# Altium PCB RoboBallPCB.PcbDoc
Units mm, origin at the board's own origin, x right, y up, seen from the top; angles counter-clockwise.
Board outline 152.4 x 101.6 mm, 2 copper layers (Top Layer, Bottom Layer); 30 components, 10 nets, 64 pads, 0 vias.
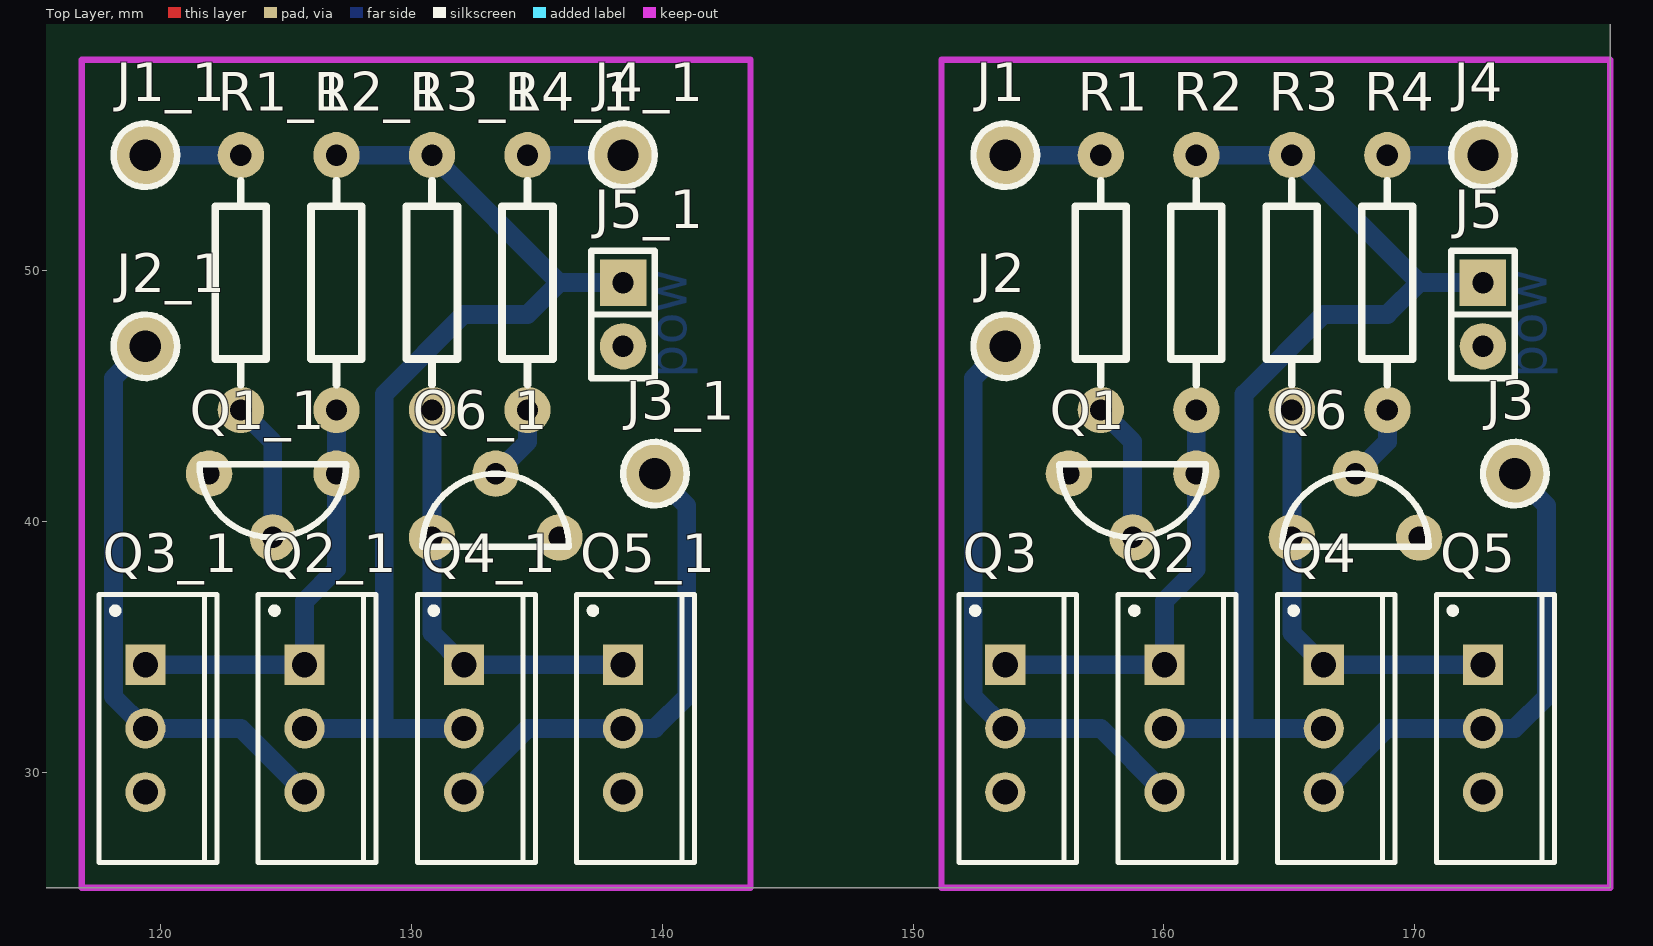
[diagram p0: Top Layer view]
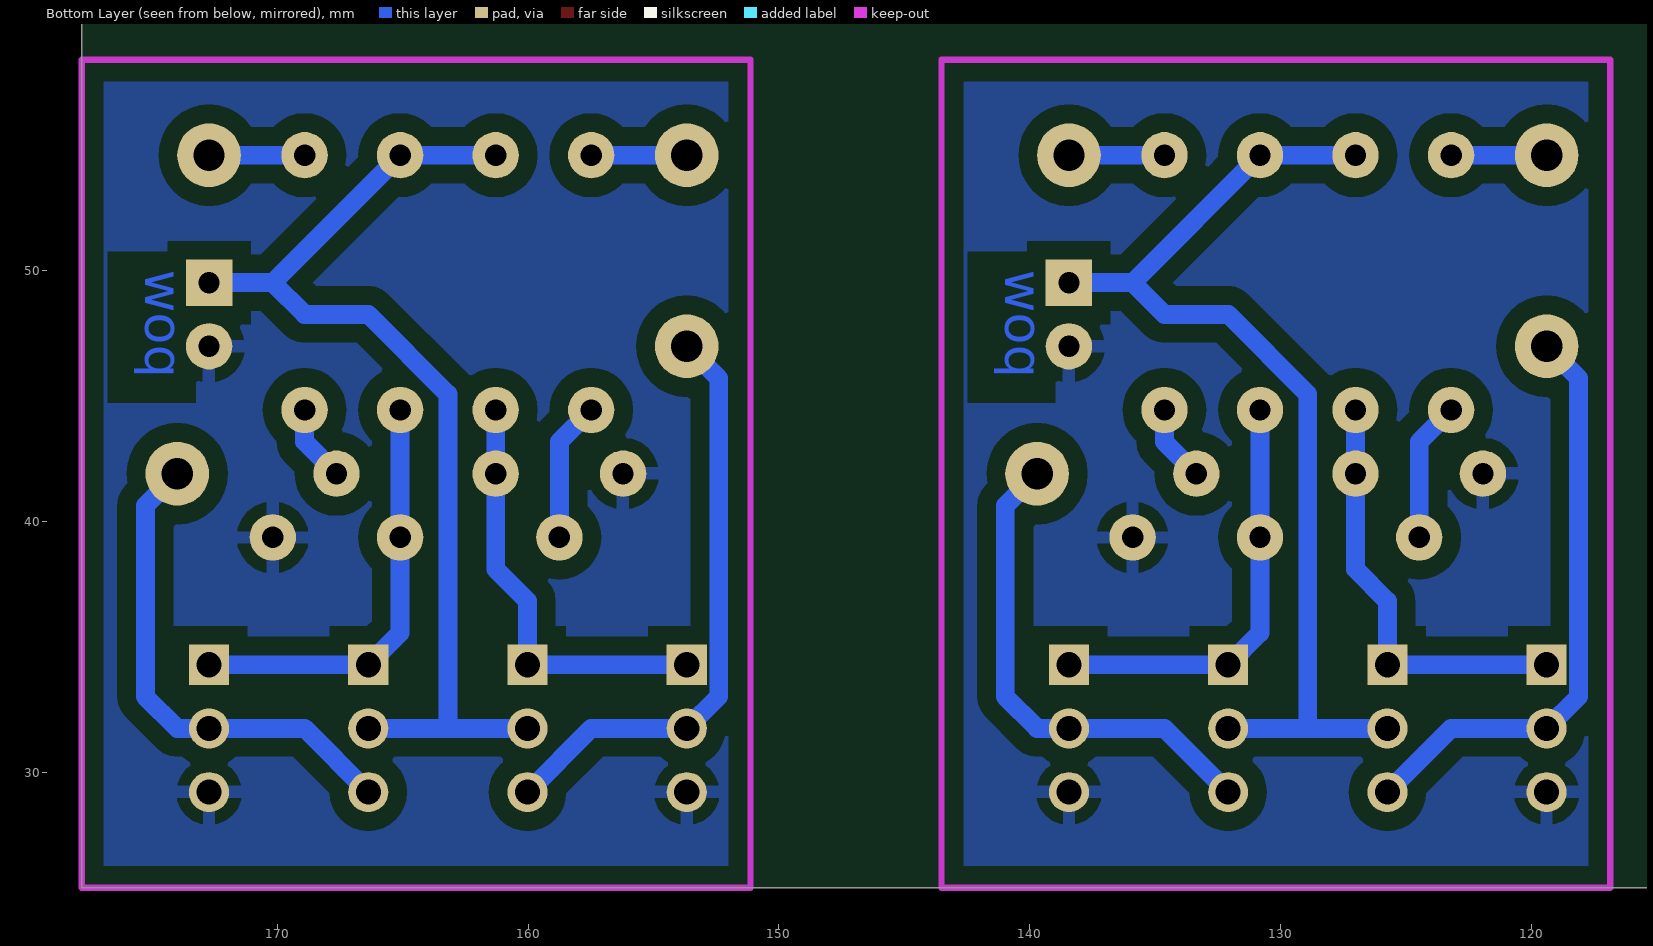
[diagram p1: Bottom Layer view, seen from below]

## Layer stack, top to bottom
Top Solder: solder mask 0.0102, Solder Resist, Dk 3.5
Top Layer: signal copper 0.0356
Dielectric 1: dielectric 0.32, FR-4, Dk 4.8
Bottom Layer: signal copper 0.0356
Bottom Solder: solder mask 0.0102, Solder Resist, Dk 3.5

## Board outline
25.4,25.4 177.8,25.4 177.8,127 25.4,127

## Design rules (kind name [scope] priority, off if disabled: settings)
Clearance [All] p1: gap=0.75 ignorepadtopadclearanceinfootprint=TRUE except(0.1: Arc-Arc Arc-Track Arc-SMDPad Arc-THPad Arc-Via Arc-Text Arc-Hole Track-Track Track-SMDPad Track-THPad Track-Via Track-Text Track-Hole SMDPad-SMDPad SMDPad-THPad SMDPad-Via SMDPad-Text SMDPad-Hole THPad-THPad THPad-Via THPad-Text THPad-Hole Via-Via Via-Text Via-Hole Text-Text Text-Hole)
HoleSize [All] p1: absolutevalues=TRUE maxlimit=4.1 minlimit=0.75 maxpercent=80.000 minpercent=20.000
MinimumAnnularRing [All] p1: minimumring=0.5
PolygonConnect [All] p1: connectstyle=Relief reliefconductorwidth=0.5 reliefentries=4 polygonreliefangle="90 Angle" airgapwidth=0.5
RoutingVias [All] p1: holewidth=0.85 width=1.85 viastyle="Through Hole" minholewidth=0.75 minwidth=1.75 maxholewidth=0.95 maxwidth=1.95
SolderMaskExpansion [All] p1: expansion=0.102
Width [All] p1: maxlimit=6 minlimit=0.4 preferedwidth=0.75
29 further rules are at their usual default settings.

## Classes and differential pairs
component class RoboBallPCB: J1 J2 J3 J4 J5 Q1 Q2 Q3 Q4 Q5 Q6 R1 R2 R3 R4

## Components (designator, comment, footprint, x,y, rotation, side; value= is the part's Value field where it differs from the comment)
J1 "CON1" Pin1 153.67,54.61 r0 top
J1_1 "CON1" Pin1 119.38,54.61 r0 top (schematic designator J1)
J2 "CON1" Pin1 153.67,46.99 r0 top
J2_1 "CON1" Pin1 119.38,46.99 r0 top (schematic designator J2)
J3 "CON1" Pin1 173.99,41.91 r0 top
J3_1 "CON1" Pin1 139.7,41.91 r0 top (schematic designator J3)
J4 "CON1" Pin1 172.72,54.61 r0 top
J4_1 "CON1" Pin1 138.43,54.61 r0 top (schematic designator J4)
J5 "CON2" SIP-2 172.72,48.26 r270 top
J5_1 "CON2" SIP-2 138.43,48.26 r270 top (schematic designator J5)
Q1 "BC547B" TO-92/EBC 158.75,41.91 r180 top
Q1_1 "BC547B" TO-92/EBC 124.46,41.91 r180 top (schematic designator Q1)
Q2 "PMOS-2" TO-220AB 160.02,31.75 r270 top
Q2_1 "PMOS-2" TO-220AB 125.73,31.75 r270 top (schematic designator Q2)
Q3 "NMOS-2" TO-220AB 153.67,31.75 r270 top
Q3_1 "NMOS-2" TO-220AB 119.38,31.75 r270 top (schematic designator Q3)
Q4 "PMOS-2" TO-220AB 166.37,31.75 r270 top
Q4_1 "PMOS-2" TO-220AB 132.08,31.75 r270 top (schematic designator Q4)
Q5 "NMOS-2" TO-220AB 172.72,31.75 r270 top
Q5_1 "NMOS-2" TO-220AB 138.43,31.75 r270 top (schematic designator Q5)
Q6 "BC547B" TO-92/EBC 167.64,39.37 r0 top
Q6_1 "BC547B" TO-92/EBC 133.35,39.37 r0 top (schematic designator Q6)
R1 "RES" Axial-0.4 157.48,49.53 r270 top value=220
R1_1 "RES" Axial-0.4 123.19,49.53 r270 top value=220 (schematic designator R1)
R2 "RES" Axial-0.4 161.29,49.53 r90 top value=1k2
R2_1 "RES" Axial-0.4 127,49.53 r90 top value=1k2 (schematic designator R2)
R3 "RES" Axial-0.4 165.1,49.53 r90 top value=1k2
R3_1 "RES" Axial-0.4 130.81,49.53 r90 top value=1k2 (schematic designator R3)
R4 "RES" Axial-0.4 168.91,49.53 r90 top value=220
R4_1 "RES" Axial-0.4 134.62,49.53 r90 top value=220 (schematic designator R4)

## Footprints (in the part's own frame and the unit in brackets; to place one, negate y for a bottom-side part, rotate by r counter-clockwise, add the part's x,y. Pads: shape width x height; smd on the part's side, far side on the other; paste and mask are expansions set on the pad)
Axial-0.4 [mm]
  round 1.85 hole 0.85: 1(-5.08,0) 2(5.08,0)
  silkscreen extent -4.06,-1.02 4.06,1.02
Pin1 [mm]
  round 2.54 hole 1.25: 1(0,0)
  silkscreen extent -1.27,-1.27 1.27,1.27
SIP-2 [mm]
  rect 1.85x1.85 hole 0.85: 1(-1.27,0)
  round 1.85 hole 0.85: 2(1.27,0)
  silkscreen extent -2.54,-1.27 2.54,1.27
TO-92/EBC [mm] "Standard-Transistor wie BC546"
  round 1.85 hole 0.85: 1(0,2.54) 2(2.54,0) 3(-2.54,0)
  silkscreen extent -2.93,-0.38 2.92,2.54
TO-220AB [mm] "TO, Thru-Hole, Vertical, Heatsink Mounted; 3 In-Line Leads; Pitch 2.54 mm"
  rect 1.6x1.6 hole 1: 1(-2.54,0)
  round 1.6 hole 1: 2(0,0) 3(2.54,0)
  silkscreen extent -5.35,-1.85 5.35,2.85, body extent -5.4,-1.9 5.4,2.9, height 19.3

## Part data
J1 J1_1 J2 J2_1 J3 J3_1 J4 J4_1 J5 J5_1: "Stecker"
Q1 Q1_1 Q6 Q6_1: library part BC546B, "Amplifier Transistor NPN Silicon", ComponentLink1Description="Manufacturer Link", ComponentLink1URL=http://www.onsemi.com/site/products/landing?taxonomyID=194, ComponentLink2Description=Datasheet, ComponentLink2URL=http://www.onsemi.com/pub/Collateral/BC546-D.PDF, DatasheetVersion=1991, LatestRevisionDate=17-Jul-2002, LatestRevisionNote="Re-released for DXP Platform.", PackageDescription="TO, Flat Index; 3 In-Line, Axial Leads; Body Dia. 4.8mm; Leads 0.48 x 0.5 mm (max)", PackageReference=29-04, PackageVersion=1996, Published=29-Sep-2000, Publisher="Altium Limited"
Q2 Q2_1 Q4 Q4_1: "P-Channel Power MOSFET", ComponentLink1Description="Manufacturer Link", ComponentLink1URL=http://www.irf.com/, DatasheetVersion=PD-9.390D, LatestRevisionDate=17-Jul-2002, LatestRevisionNote="Re-released for DXP Platform.", Note="Pin 4 not drawn and electrically connected to Pin 2.", PackageDescription="TO, Thru-Hole, Vertical, Heatsink Mounted; 3 In-Line Leads; Pitch 2.54 mm", PackageReference=TO-220AB, PackageVersion=Feb-1997, Published=8-Jun-2000, Publisher="Altium Limited"
Q3 Q3_1 Q5 Q5_1: "N-Channel Power MOSFET", ComponentLink1Description="Manufacturer Link", ComponentLink1URL=http://www.irf.com/, DatasheetVersion=PD-9.814, LatestRevisionDate=17-Jul-2002, LatestRevisionNote="Re-released for DXP Platform.", Note="Pin 2 is electrically connected to pin 4.", PackageDescription="TO, Thru-Hole, Vertical, Heatsink Mounted; 3 In-Line Leads; Pitch 2.54 mm", PackageReference=TO-220AB, PackageVersion=Feb-1997, Published=8-Jun-2000, Publisher="Altium Limited"
R1 R1_1 R2 R2_1 R3 R3_1 R4 R4_1: "Widerstand"

## Nets (pads, with @x,y where several pads share a name; then routed paths per layer and width w, separated by ;. In a path a pad name is that pad's centre, name@x,y a point inside that pad or via, vN(x,y) a via of type N, cw(c..) or ccw(c..) an arc to the next point about the centre after c; other vN are vias at no path point)
GND: J5.2 Q1.2 Q3.3 Q5.3 Q6.2
NetJ1_1: J1.1 R1.1 | length 3.8
  Bottom Layer w0.75: J1.1 R1.1
NetJ2_1: J2.1 Q2.3 Q3.2 | length 23.7
  Bottom Layer w0.75: J2.1 152.395,45.715 152.395,33.025 Q3.2 157.48,31.75 Q2.3
NetJ3_1: J3.1 Q4.3 Q5.2 | length 19.9
  Bottom Layer w0.75: Q4.3 168.91,31.75 Q5.2 173.99,31.75 175.26,33.02 175.26,40.64 J3.1
NetJ4_1: J4.1 R4.2 | length 3.8
  Bottom Layer w0.75: R4.2 J4.1
NetQ1_1: Q1.3 Q2.1 Q3.1 R2.1 | length 17
  Bottom Layer w0.75: Q3.1 Q2.1 160.02,36.83 161.29,38.1 Q1.3 R2.1
NetQ1_2: Q1.1 R1.2 | length 5.6
  Bottom Layer w0.75: R1.2 158.75,43.18 Q1.1
NetQ4_1: Q4.1 Q5.1 Q6.3 R3.1 | length 17
  Bottom Layer w0.75: R3.1 Q6.3 165.1,35.56 Q4.1 Q5.1
NetQ6_2: Q6.1 R4.1 | length 3.1
  Bottom Layer w0.75: Q6.1 168.91,43.18 R4.1
VCC: J5.1 Q2.2 Q4.2 R2.2 R3.2 | length 42
  Bottom Layer w0.75: Q2.2 163.195,31.75 ; R2.2 R3.2 170.18,49.53 ; Q4.2 163.195,31.75 ; J5.1 170.18,49.53 ; 163.195,31.75 163.195,45.085 166.37,48.26 168.91,48.26 170.18,49.53
pads on no net: J1_1.1 J2_1.1 J3_1.1 J4_1.1 J5_1.1 J5_1.2 Q1_1.1 Q1_1.2 Q1_1.3 Q2_1.1 Q2_1.2 Q2_1.3 Q3_1.1 Q3_1.2 Q3_1.3 Q4_1.1 Q4_1.2 Q4_1.3 Q5_1.1 Q5_1.2 Q5_1.3 Q6_1.1 Q6_1.2 Q6_1.3 R1_1.1 R1_1.2 R2_1.1 R2_1.2 R3_1.1 R3_1.2 R4_1.1 R4_1.2
copper on no net: | length 136
  Bottom Layer w0.75: 119.38,34.29 125.73,34.29 125.73,36.83 127,38.1 127,41.91 127,44.45 ; 119.38,46.99 118.105,45.715 118.105,33.025 119.38,31.75 123.19,31.75 125.73,29.21 ; 119.38,54.61 123.19,54.61 ; 123.19,44.45 124.46,43.18 124.46,39.37 ; 125.73,31.75 128.905,31.75 ; 127,54.61 130.81,54.61 135.89,49.53 ; 130.81,44.45 130.81,39.37 130.81,35.56 132.08,34.29 138.43,34.29 ; 132.08,29.21 134.62,31.75 138.43,31.75 139.7,31.75 140.97,33.02 140.97,40.64 139.7,41.91 ; 132.08,31.75 128.905,31.75 ; 133.35,41.91 134.62,43.18 134.62,44.45 ; 134.62,54.61 138.43,54.61 ; 138.43,49.53 135.89,49.53 ; 128.905,31.75 128.905,45.085 132.08,48.26 134.62,48.26 135.89,49.53

## Polygon pours and split planes (outlines as drawn)
no net on Bottom Layer "NONET_L02_P018" (solid, remove dead copper, pour order 18): 143.51,58.42 143.51,25.4 116.84,25.4 116.84,58.42
GND on Bottom Layer "GND_L02_P010" (solid, remove dead copper, pour order 10): 177.8,58.42 177.8,25.4 151.13,25.4 151.13,58.42

## Keep-outs
Keep-Out Layer:
  lines w0.254: 116.84,25.4 143.51,25.4 143.51,58.42 116.84,58.42 116.84,25.4 ; 151.13,25.4 151.13,58.42 177.8,58.42 177.8,25.4 151.13,25.4

## Other copper
Bottom Layer:
  text "pow" at 140.97,45.72 h1.52 r90
  text "pow" at 175.26,45.72 h1.52 r90

## Silkscreen, mask and mechanical layers (free items; w line width, h text height)
Kontur:
  lines w0.254: 116.84,25.4 116.84,58.42 143.51,58.42 143.51,25.4 116.84,25.4 ; 151.13,25.4 177.8,25.4 177.8,58.42 151.13,58.42 151.13,25.4
Drill Drawing:
  circle w0.254: c63.579,87.207 r0.847
  lines w0.254: 62.733,80.433 64.426,80.433 63.579,78.74 62.733,80.433 ; 62.733,82.973 63.156,82.973 63.579,82.55 64.003,82.973 64.426,82.973 64.003,83.397 64.426,83.82 64.003,83.82 63.579,84.243 63.156,83.82 62.733,83.82 63.156,83.397 62.733,82.973
  lines w0.381: 61.214,77.597 327.942,77.597 ; 61.214,89.027 327.942,89.027 ; 75.206,73.787 75.206,92.837 ; 88.919,73.787 88.919,92.837 ; 117.358,73.787 117.358,92.837 ; 130.208,73.787 130.208,92.837 ; 148.846,73.787 148.846,92.837 ; 186.935,73.787 186.935,92.837 ; 201.917,73.787 201.917,92.837 ; 220.86,73.787 220.86,92.837 ; 237.366,73.787 237.366,92.837 ; 259.051,73.787 259.051,92.837 ; 292.925,73.787 292.925,92.837 ; 61.214,73.787 327.942,73.787 327.942,92.837 61.214,92.837 61.214,73.787
  text "Symbol" at 63.5,90.17 h1.83
  text "Count" at 76.349,90.17 h1.83
  text "Hole Size" at 90.062,90.17 h1.83
  text "Plated" at 118.501,90.17 h1.83
  text "Hole Type" at 131.351,90.17 h1.83
  text "Drill Layer Pair" at 149.989,90.17 h1.83
  text "Via/Pad" at 188.078,90.17 h1.83
  text "Pad Shape" at 203.06,90.17 h1.83
  text "Template" at 222.003,90.17 h1.83
  text "Description" at 238.509,90.17 h1.83
  text "Hole Tolerance (+)" at 260.194,90.17 h1.83
  text "Hole Tolerance (-)" at 294.068,90.17 h1.83
  text "8" at 76.349,86.36 h1.52
  text "1,250mm (49,21mil)" at 90.062,86.36 h1.52
  text "PTH" at 118.501,86.36 h1.52
  text "Round" at 131.351,86.36 h1.52
  text "Top Layer - Bottom Layer" at 149.989,86.36 h1.52
  text "Pad" at 188.078,86.36 h1.52
  text "Rounded" at 203.06,86.36 h1.52
  text "c254h125" at 222.003,86.36 h1.52
  text "24" at 76.349,82.55 h1.52
  text "1,000mm (39,37mil)" at 90.062,82.55 h1.52
  text "PTH" at 118.501,82.55 h1.52
  text "Round" at 131.351,82.55 h1.52
  text "Top Layer - Bottom Layer" at 149.989,82.55 h1.52
  text "Pad" at 188.078,82.55 h1.52
  text "(Mixed)" at 203.06,82.55 h1.52
  text "(Mixed)" at 222.003,82.55 h1.52
  text "32" at 76.349,78.74 h1.52
  text "0,850mm (33,47mil)" at 90.062,78.74 h1.52
  text "PTH" at 118.501,78.74 h1.52
  text "Round" at 131.351,78.74 h1.52
  text "Top Layer - Bottom Layer" at 149.989,78.74 h1.52
  text "Pad" at 188.078,78.74 h1.52
  text "(Mixed)" at 203.06,78.74 h1.52
  text "(Mixed)" at 222.003,78.74 h1.52
  text "64 Total" at 76.349,74.93 h1.52